# EAGLE board driver LF (EAGLE 7.5.0)
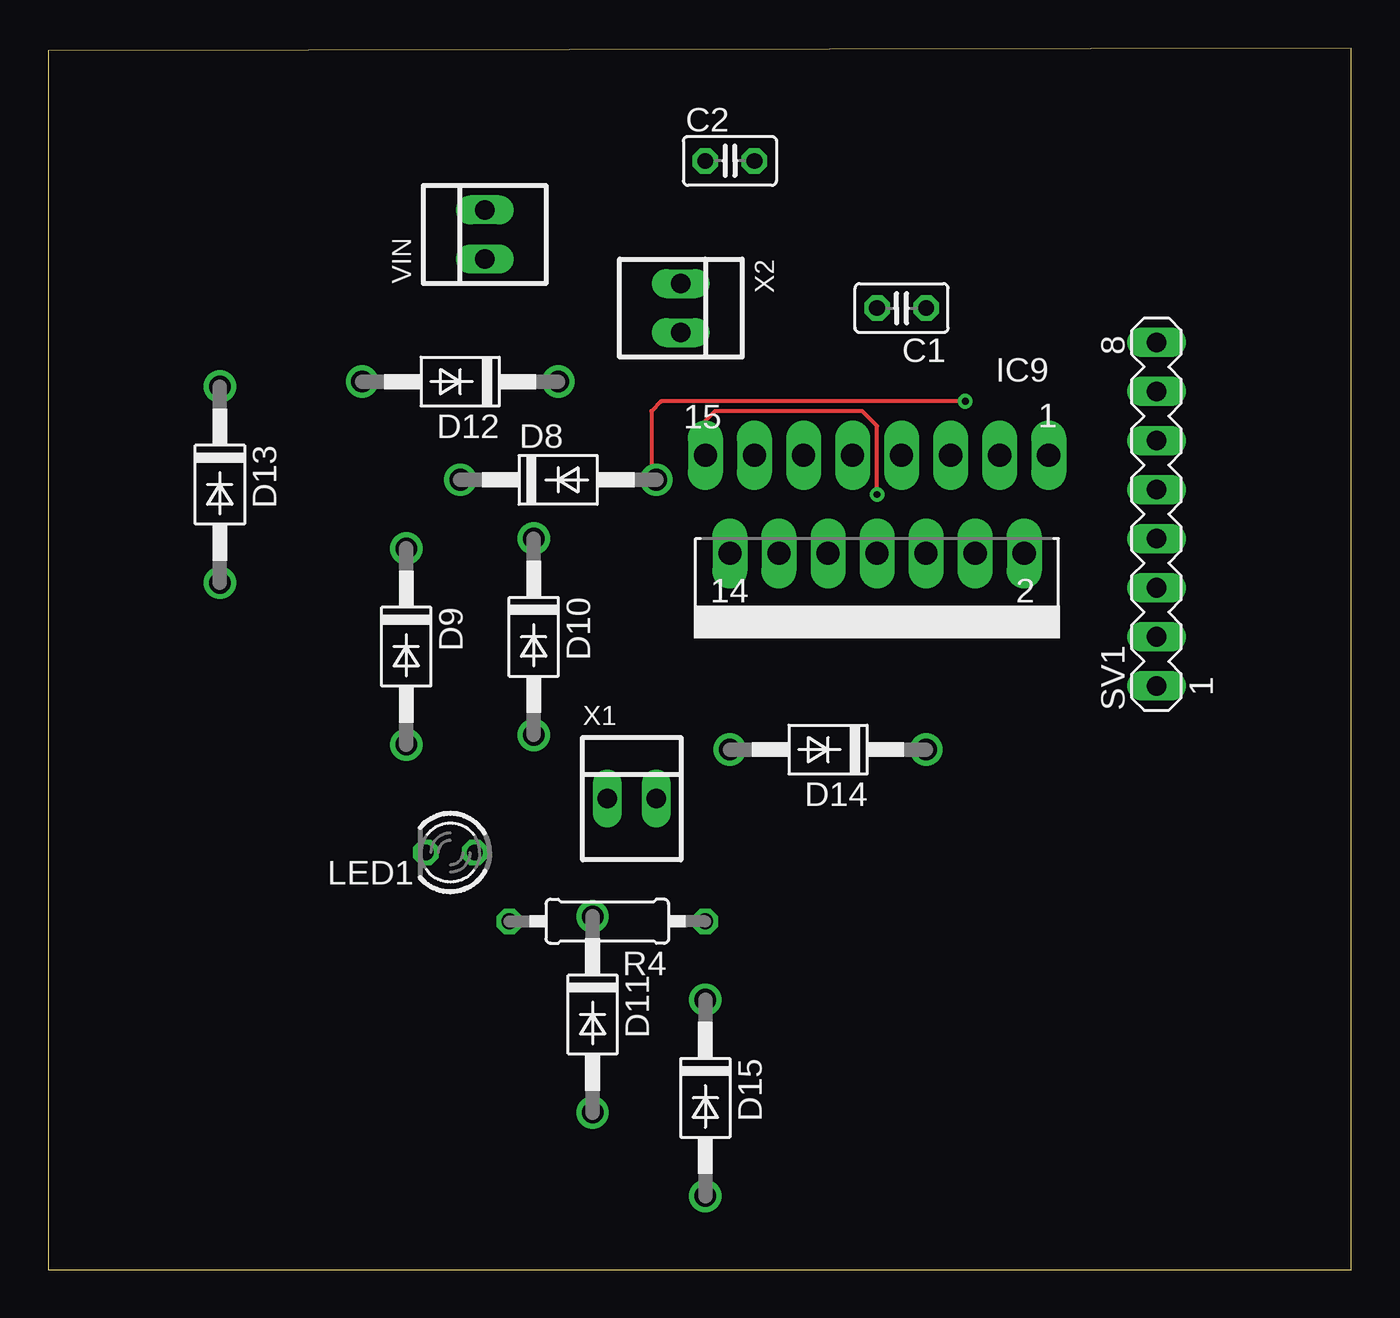
[diagram p0: board, top side]
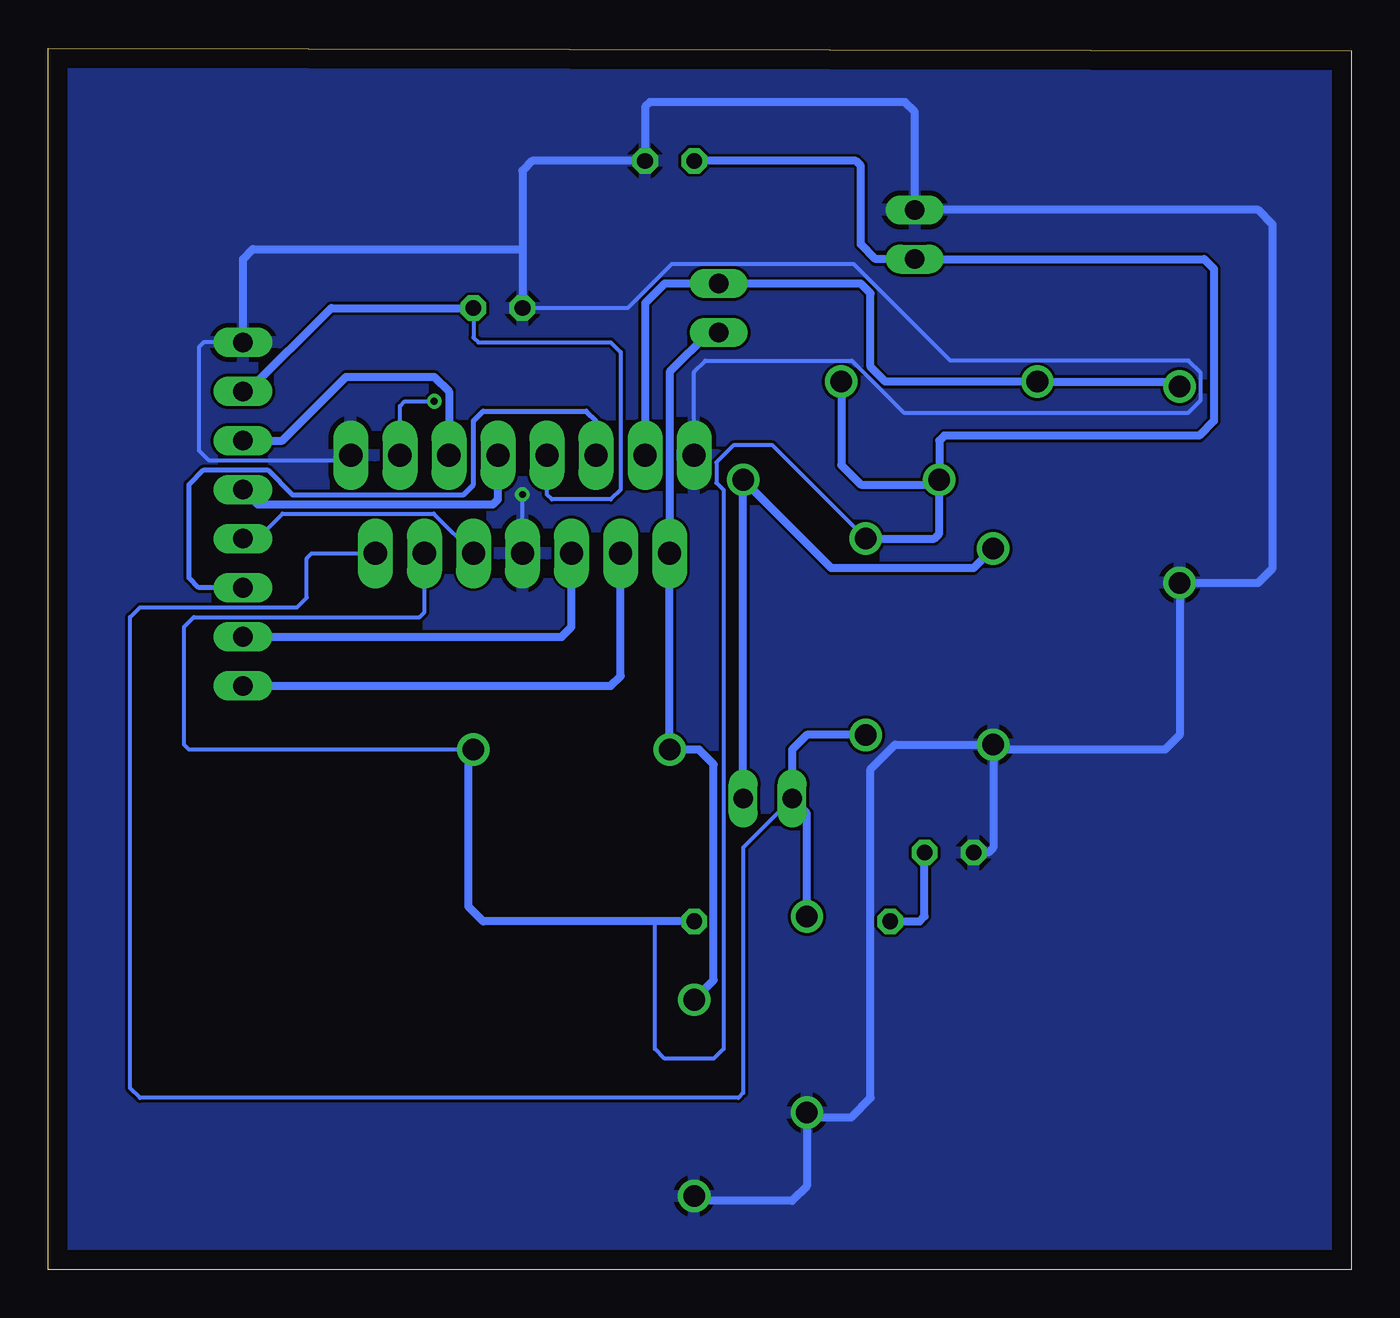
[diagram p1: board, bottom side, seen from below]

Size 67.49 x 63.24 mm. Coordinates in mm from the lower left corner, seen from the top.
Outline: 0,0 67.49,0 67.49,63.24 0,63.11 0,0
Copper layers (1*16): Top 0.035mm / dielectric 1.5mm / Bottom 0.035mm
Design rules "default": minimum track width 6mil, minimum drill 0.35mm, track to track 6mil, track to pad 6mil, pad to pad 6mil, via to via 6mil, smd to smd 6mil, copper to edge 40mil, drill to drill 6mil, minimum pad ring 10mil, minimum via ring 8mil, stop-mask expansion 4mil, vias tented up to drill 0mil, thermal gap 10mil

## Footprints (pad centres in the part's own frame; a part is rotated, then mirrored left to right if it is on the bottom)
C025-025X050 = drill 0.813 octagon: 1 -1.27,0; 2 1.27,0
DO41-10 = drill 1.118: A 5.08,0; C -5.08,0
MULTIWATT-15 = drill 1.2 long: 1 -8.89,-7.62; 2 -7.62,-2.54; 3 -6.35,-7.62; 4 -5.08,-2.54; 5 -3.81,-7.62; 6 -2.54,-2.54; 7 -1.27,-7.62; 8 0,-2.54; 9 1.27,-7.62; 10 2.54,-2.54; 11 3.81,-7.62; 12 5.08,-2.54; 13 6.35,-7.62; 14 7.62,-2.54; 15 8.89,-7.62
LED3MM = drill 0.813 octagon: A -1.27,0; K 1.27,0
0207/10 = drill 0.813 octagon: 1 -5.08,0; 2 5.08,0
MA08-1 = drill 1.016 long: 1 -8.89,0; 2 -6.35,0; 3 -3.81,0; 4 -1.27,0; 5 1.27,0; 6 3.81,0; 7 6.35,0; 8 8.89,0
22-23-2021 = drill 1 long: 1 -1.27,0; 2 1.27,0

## Placement (x,y rotation side)
C1  100nF  [C025-025X050]  44.2,49.78 180 top
C2  100nF  [C025-025X050]  35.31,57.4 0 top
D8  1N4004  [DO41-10]  26.42,40.89 0 top
D9  1N4004  [DO41-10]  18.54,32.26 270 top
D10  1N4004  [DO41-10]  25.15,32.77 270 top
D11  1N4004  [DO41-10]  28.19,13.21 270 top
D12  1N4004  [DO41-10]  21.34,45.97 180 top
D13  1N4004  [DO41-10]  8.89,40.64 270 top
D14  1N4004  [DO41-10]  40.39,26.92 180 top
D15  1N4004  [DO41-10]  34.04,8.89 270 top
IC9  L298  [MULTIWATT-15]  42.93,34.54 180 top
LED1  [LED3MM]  20.83,21.59 180 top
R4  330  [0207/10]  28.96,18.03 180 top
SV1  [MA08-1]  57.4,39.12 90 top
VIN  22-23-2021  [22-23-2021]  22.61,53.59 90 top
X1  22-23-2021  [22-23-2021]  30.23,24.38 0 top
X2  22-23-2021  [22-23-2021]  32.77,49.78 270 top

## Library data of the parts
C1 C2 R4 = rcl
D8-D15 = diode
IC9 = st-microelectronics
LED1 = led
SV1 = con-lstb; OC_FARNELL: unknown; OC_NEWARK: unknown
VIN X1 X2 = con-molex; MF: MOLEX; MPN: 22-23-2021; OC_FARNELL: 1462926; OC_NEWARK: 25C3832

## Nets
GND: C1.2 C2.2 D9.A D11.A D13.A D15.A IC9.1 IC9.8 IC9.15 LED1.K SV1.8 VIN.2
N$1: IC9.5 SV1.6
N$3: IC9.7 SV1.5
N$5: IC9.12 SV1.1
N$8: IC9.10 SV1.2
N$16: IC9.6 SV1.4
N$17: IC9.11 SV1.3
N$44: LED1.A R4.2
N$204: D8.A D9.C IC9.3 X1.2
N$205: D10.A D11.C IC9.2 X1.1
N$206: D12.A D13.C IC9.13 X2.1
N$207: D14.A D15.C IC9.14 X2.2
VCC: C1.1 IC9.9 SV1.7
VDD: C2.1 D8.C D10.C D12.C D14.C IC9.4 R4.1 VIN.1

## Tracks (layer width: path | path; a pad name or v marks a point on that pad's centre or on a via)
GND  (via drill 0.35)
  Top 0.203: IC9.15 34.04,43.94 34.54,44.45 42.16,44.45 42.93,43.69 v42.93,40.13
  Bottom 0.203: SV1.8 59.44,48.01 59.69,47.75 59.69,42.42 59.18,41.91 52.07,41.91 IC9.1 | C1.2 37.48,49.78 35.2,52.06 25.76,52.06 20.77,47.07 8.44,47.07 7.8,46.43 7.8,45.01 8.44,44.37 23.18,44.37 25.87,47.07 33.45,47.07 34.04,46.48 IC9.15 | IC9.8 v42.93,40.13
  Bottom 0.406: D9.A 18.29,26.92 9.65,26.92 8.89,27.69 D13.A 4.83,35.56 4.06,36.32 4.06,54.1 4.83,54.86 VIN.2 22.61,59.94 23.11,60.45 36.32,60.45 36.58,60.2 C2.2 42.42,57.4 42.93,56.9 42.93,52.83 | D9.A 23.62,27.18 24.89,25.91 24.89,8.89 25.91,7.87 28.19,7.87 | D11.A 28.19,7.87 | 28.19,7.87 28.19,4.32 28.96,3.56 33.78,3.56 D15.A | D9.A 18.54,21.84 18.8,21.59 LED1.K | 42.93,52.83 C1.2 | IC9.1 51.82,42.42 | SV1.8 57.4,52.32 56.9,52.83 42.93,52.83
  pour Bottom: 0,63.25 67.44,63.25 67.44,0 0,0
N$1
  Bottom 0.406: SV1.6 55.37,42.93 52.07,46.23 47.5,46.23 46.74,45.47 IC9.5
N$3
  Bottom 0.406: SV1.5 56.64,39.62 44.45,39.62 44.2,39.88 IC9.7
N$5
  Bottom 0.406: SV1.1 38.35,30.23 37.85,30.73 IC9.12
N$8
  Bottom 0.406: SV1.2 40.89,32.77 40.39,33.27 IC9.10
N$16
  Bottom 0.203: SV1.4 56.64,37.85 55.35,39.14 47.52,39.14 IC9.6
N$17
  Bottom 0.254: SV1.3 59.69,35.31 60.2,35.81 60.2,40.64 59.44,41.4 56.13,41.4 54.86,40.13 45.97,40.13 45.47,40.64 45.47,43.94 44.96,44.45 39.62,44.45 39.12,43.94 IC9.11
N$44
  Bottom 0.406: 22.35,21.34 LED1.A 22.1,18.29 22.35,18.03 R4.2
N$204  (via drill 0.35)
  Top 0.203: v47.5,44.96 31.75,44.96 31.24,44.45 31.24,41.15 D8.A
  Bottom 0.203: IC9.3 49.28,44.7 49.02,44.96 v47.5,44.96
  Bottom 0.406: D9.C 19.56,36.32 26.92,36.32 D8.A X1.2
N$205
  Bottom 0.203: X1.1 31.5,21.84 31.5,9.14 31.75,8.89 62.74,8.89 63.25,9.4 63.25,33.78 62.74,34.29 54.61,34.29 54.1,34.8 54.1,36.83 53.85,37.08 IC9.2
  Bottom 0.406: D11.C 28.19,23.62 X1.1 28.96,26.92 28.19,27.69 D10.A
N$206
  Bottom 0.406: D13.C 9.14,45.97 D12.A 24.13,45.97 24.89,46.74 24.89,50.55 25.4,51.05 X2.1 35.56,51.05 36.58,50.04 IC9.13
N$207
  Bottom 0.406: X2.2 33.27,48.51 35.31,46.48 IC9.14 D14.A | 35.56,26.92 D14.A | D15.C 33.02,14.99 33.02,26.16 33.78,26.92 D14.A
VCC
  Bottom 0.203: C1.1 45.47,48.26 45.21,48.01 38.35,48.01 37.85,47.5 37.85,40.39 38.35,39.88 41.4,39.88 41.66,40.13 IC9.9
  Bottom 0.406: SV1.7 57.15,45.47 52.83,49.78 C1.1
VDD
  Bottom 0.203: D14.C 60.2,26.92 60.45,27.18 60.45,33.27 59.94,33.78 48.26,33.78 48.01,34.04 IC9.4 | D10.C 29.97,42.67 32,42.67 32.88,41.79 32.88,40.73 32.51,40.36 32.51,11.43 33.02,10.92 35.56,10.92 36.07,11.43 36.07,18.03
  Bottom 0.406: C2.1 25.65,57.4 25.4,57.15 25.4,53.09 24.64,52.32 VIN.1 7.62,52.32 7.11,51.82 7.11,43.94 7.87,43.18 21.08,43.18 21.34,42.93 D8.C | D12.C 26.42,41.66 25.4,40.64 21.59,40.64 D8.C | D10.C 21.59,37.85 21.34,38.1 D8.C | R4.1 36.07,18.03 44.96,18.03 45.72,18.8 45.72,26.67 D14.C